# Altium PCB STM32L0_USB_TempSensor.PcbDoc
Units mm, origin at the board's own origin, x right, y up, seen from the top; angles counter-clockwise.
Board outline 71.5 x 35.5 mm, 2 copper layers (Top Layer, Bottom Layer); 42 components, 29 nets, 127 pads, 141 vias.
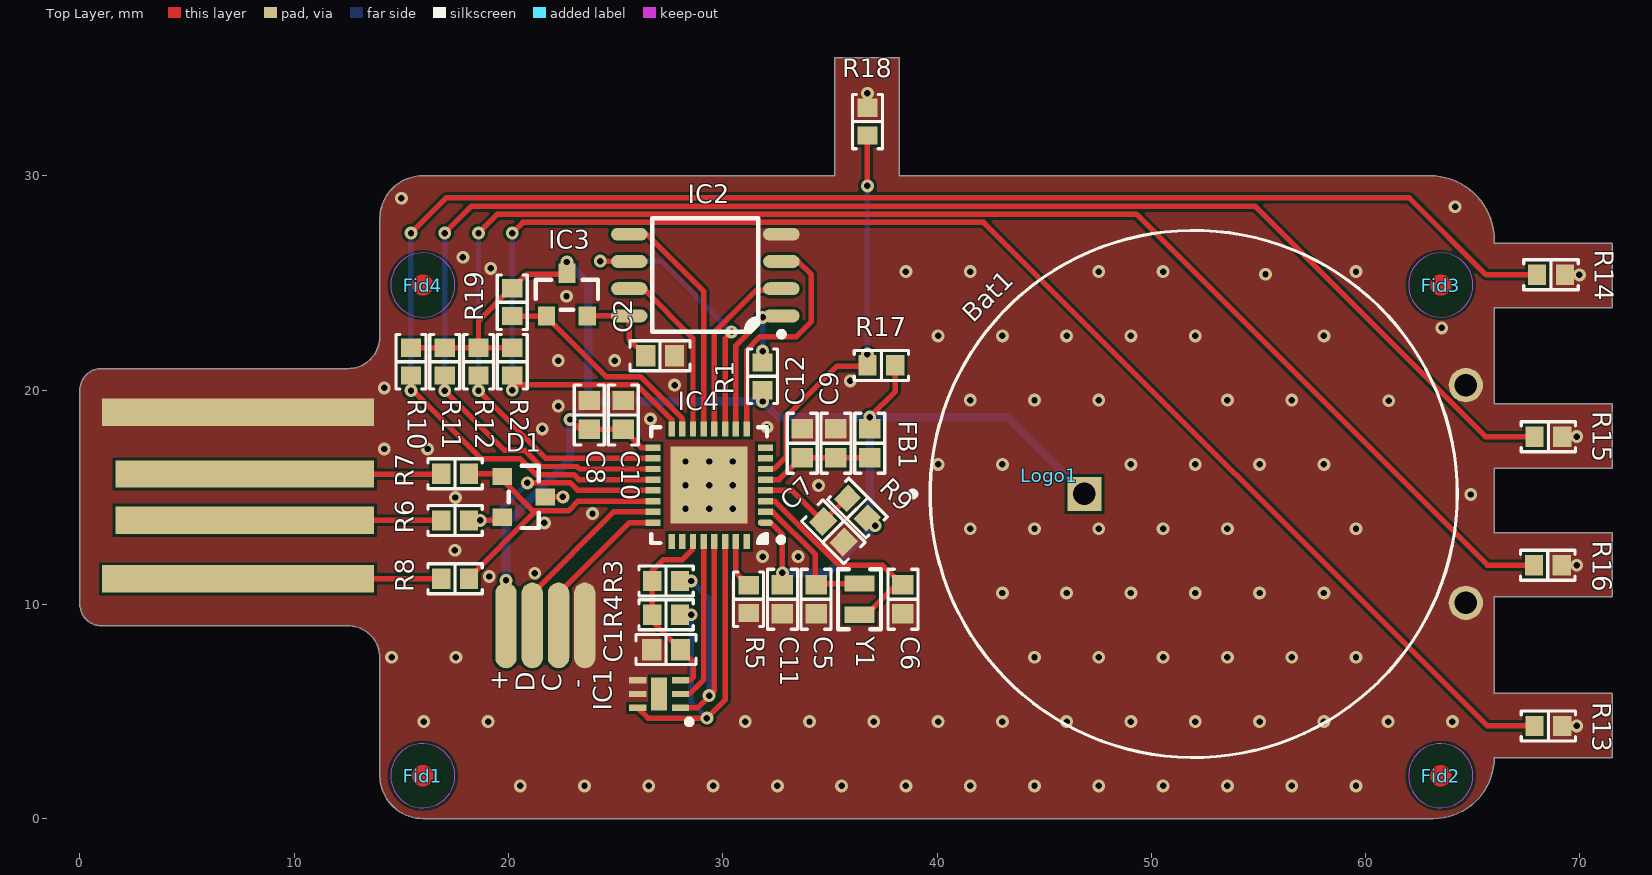
[diagram p0: Top Layer view]
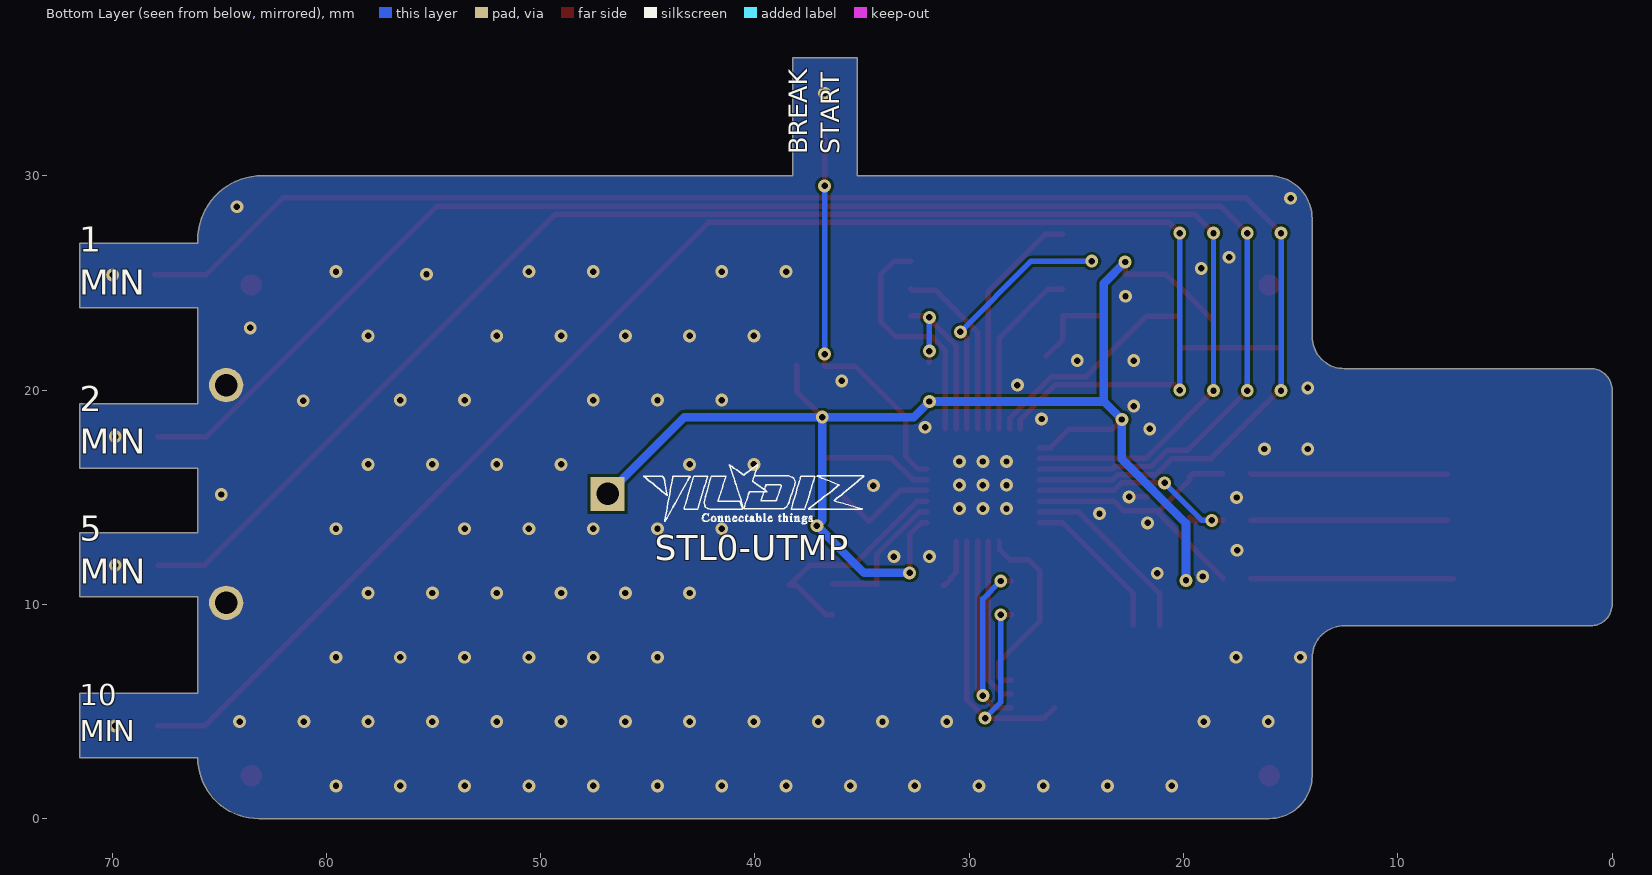
[diagram p1: Bottom Layer view, seen from below]
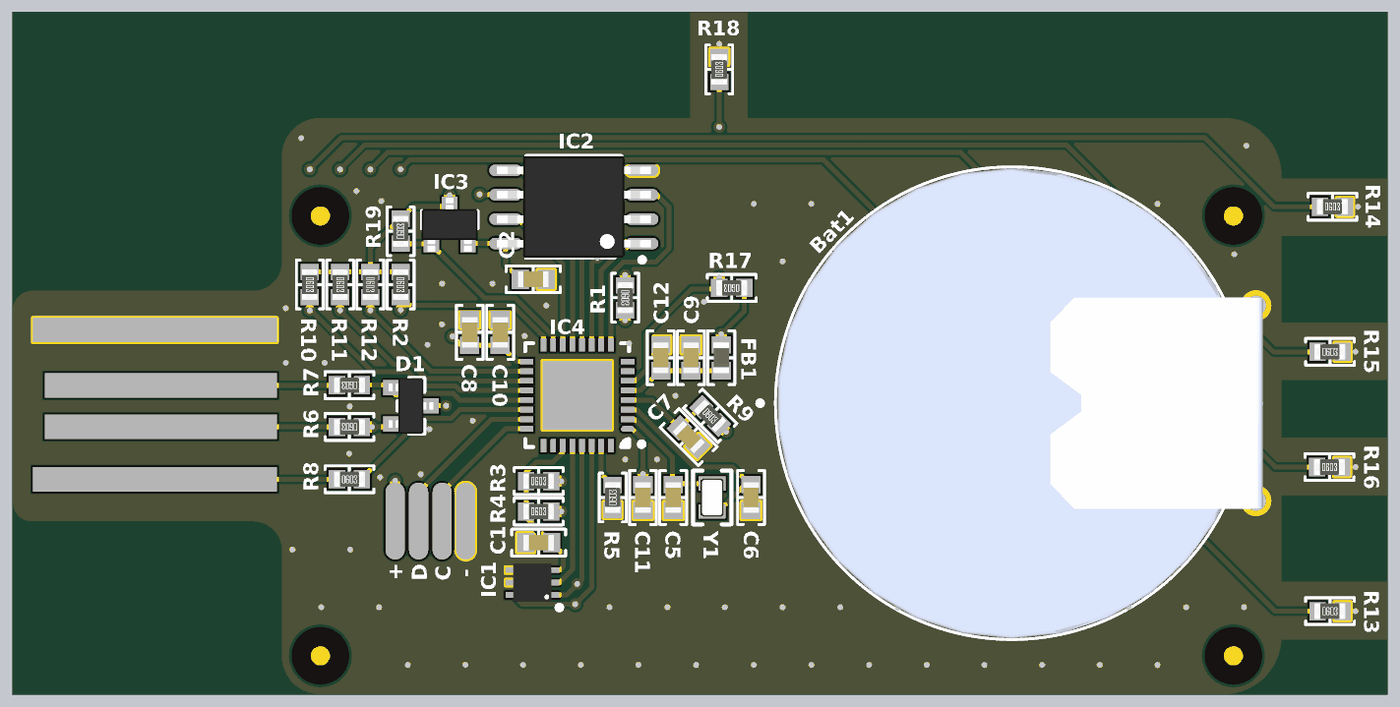
[diagram p2: 3D render of the assembled board from above, using the file's embedded part models]

## Layer stack, top to bottom
Top Solder: solder mask 0.0102, Solder Resist, Dk 3.5
Top Layer: signal copper 0.0356
Dielectric 1: dielectric 0.32, FR-4, Dk 4.8
Bottom Layer: signal copper 0.0356
Bottom Solder: solder mask 0.0102, Solder Resist, Dk 3.5

## Board outline
1,9 12.5,9 cw(c12.5,7.5) 14,7.5 14,2 ccw(c16,2) 16,0 63.15,0 ccw(c63.15,2.85) 66,2.85 71.5,2.85 71.5,5.85 66,5.85 66,10.35 71.5,10.35 71.5,13.35 66,13.35 66,16.35 71.5,16.35 71.5,19.35 66,19.35 66,23.85 71.5,23.85 71.5,26.85 66,26.85 66,27 ccw(c63,27) 63,30 38.225,30 38.225,35.5 35.225,35.5 35.225,30 16,30 ccw(c16,28) 14,28 14,22.5 cw(c12.5,22.5) 12.5,21 1,21 ccw(c1,20) 0,20 0,10 ccw(c1,10)

## Design rules (kind name [scope] priority, off if disabled: settings)
Clearance [All] p1: gap=0.127 ignorepadtopadclearanceinfootprint=FALSE
DiffPairsRouting "Schematic Differential Pairs Routing" [InNet('USB_HS_DM_N')] p1: maxlimit=0.254 minlimit=0.127 mostfreqgap=0.254 toplayer_minwidth=0.127 toplayer_maxwidth=0.381 toplayer_prefwidth=0.127 bottomlayer_minwidth=0.127 bottomlayer_maxwidth=0.381 bottomlayer_prefwidth=0.127 maxuncoupledlength=12.7
DiffPairsRouting USB_HS_DM_P [InNet('USB_HS_DM_P')] p2: maxlimit=0.254 minlimit=0.127 mostfreqgap=0.254 toplayer_minwidth=0.127 toplayer_maxwidth=0.381 toplayer_prefwidth=0.127 bottomlayer_minwidth=0.127 bottomlayer_maxwidth=0.381 bottomlayer_prefwidth=0.127 maxuncoupledlength=12.7
DiffPairsRouting [All] p3: maxlimit=0.3 minlimit=0.127 mostfreqgap=0.2 toplayer_minwidth=0.127 toplayer_maxwidth=0.3 toplayer_prefwidth=0.2 bottomlayer_minwidth=0.127 bottomlayer_maxwidth=0.3 bottomlayer_prefwidth=0.2 maxuncoupledlength=12.7
MatchedLengths "Schematic Matched Net Lengths_1" [InNet('USB_HS_DM_N')] p1: tolerance=2.54 checknetsindiffpair=TRUE checkdiffpairvsdiffpair=FALSE checkxsignals=FALSE checkothers=FALSE
MatchedLengths "Schematic Matched Net Lengths" [InNet('USB_HS_DM_P')] p2: tolerance=2.54 checknetsindiffpair=TRUE checkdiffpairvsdiffpair=FALSE checkxsignals=FALSE checkothers=FALSE
PlaneConnect [All] p1: planeconnectstyle=Direct reliefexpansion=0.508 reliefentries=4 reliefconductorwidth=0.254 reliefairgap=0.254
PolygonConnect [All] p1: connectstyle=Direct reliefconductorwidth=0.254 reliefentries=4 polygonreliefangle="90 Angle" airgapwidth=0.254
RoutingVias [All] p1: holewidth=0.3 width=0.6 viastyle="Through Hole" minholewidth=0.3 minwidth=0.6 maxholewidth=1 maxwidth=5
SolderMaskExpansion [All] p1: expansion=0.102 istentingtop=FALSE
Width [All] p1: maxlimit=3 minlimit=0.127 preferedwidth=0.2
28 further rules are at their usual default settings.

## Classes and differential pairs
component class STM32L0_USB_TempSensor: Fid1 Fid2 Fid3 Fid4 Logo1
differential pair class USB_FS: USB_HS_DM
component class U_STM32L0: Bat1 C5 C6 C7 C8 C9 C10 C11 C12 D1 FB1 IC4 R2 R3 R4 R5 R6 R7 R8 R9 R10 R11 R12 R13 R14 R15 R16 R17 R18 Y1
component class U_Sensor-Flash: C1 C2 IC1 IC2 IC3 R1 R19
differential pair USB_HS_DM: +USB_HS_DM_P -USB_HS_DM_N

## Components (designator, comment, footprint, x,y, rotation, side; value= is the part's Value field where it differs from the comment)
Bat1 "#NAME?" CR-2450/G1AN 51.975,15.15 r0 top locked
C1 "100nF" "CAP 0603/1608" 27.356,7.89 r0 top
C2 "100nF" "CAP 0603/1608" 27.075,21.6 r0 top
C5 "15pF" "CAP 0603/1608" 34.356,10.24 r90 top
C6 "15pF" "CAP 0603/1608" 38.406,10.24 r90 top
C7 "100nF" "CAP 0603/1608" 35.158,13.388 r135 top
C8 "10uF" "CAP 0603/1608" 23.771,18.84 r270 top
C9 "1uF" "CAP 0603/1608" 35.281,17.515 r270 top
C10 "100nF" "CAP 0603/1608" 25.356,18.84 r270 top
C11 "100nF" "CAP 0603/1608" 32.781,10.24 r90 top
C12 "100nF" "CAP 0603/1608" 33.706,17.515 r270 top
D1 "#NAME?" "ON SEMI SOT-23-3" 20.711,15.015 r0 top
FB1 "#NAME?" "FER 0603/1608" 36.856,17.515 r90 top
Fid1 "Fiducial mark" Fiducial 16,2 r0 top
Fid2 "Fiducial mark" Fiducial 63.5,2 r90 top
Fid3 "Fiducial mark" Fiducial 63.5,24.9 r90 top
Fid4 "Fiducial mark" Fiducial 16,24.9 r90 top
IC1 "STTS22HTR" "ST UDFN-6 2x2x0.5" 27.031,5.815 r180 top
IC2 "#NAME?" "WINBOND SOIC-8 208MIL WIDE" 29.186,25.365 r180 top
IC3 "#NAME?" "DIODES SOT-23-3" 22.725,24.45 r90 top
IC4 "ST STM32L052 32PIN" "ST VFQFN-33 5x5mm" 29.361,15.565 r180 top
Logo1 "Logo symbol" LOGO_YILDIZIOT 45.225,16 r180 top
R1 "10kR" "RES 0603/1608" 31.856,20.64 r270 top
R2 "10kR" "RES 0603/1608" 20.175,21.325 r270 top
R3 "10kR" "RES 0603/1608" 27.356,11.09 r0 top
R4 "10kR" "RES 0603/1608" 27.356,9.515 r0 top
R5 "10kR" "RES 0603/1608" 31.206,10.24 r90 top
R6 "20R" "RES 0603/1608" 17.511,13.915 r180 top
R7 "20R" "RES 0603/1608" 17.511,16.09 r180 top
R8 "10kR" "RES 0603/1608" 17.511,11.19 r0 top
R9 "10kR" "RES 0603/1608" 36.281,14.49 r315 top
R10 "10kR" "RES 0603/1608" 15.45,21.325 r270 top
R11 "10kR" "RES 0603/1608" 17.025,21.325 r270 top
R12 "10kR" "RES 0603/1608" 18.6,21.325 r270 top
R13 "10kR" "RES 0603/1608" 68.525,4.325 r0 top
R14 "10kR" "RES 0603/1608" 68.65,25.375 r0 top
R15 "10kR" "RES 0603/1608" 68.525,17.825 r0 top
R16 "10kR" "RES 0603/1608" 68.5,11.825 r0 top
R17 "10kR" "RES 0603/1608" 37.4,21.15 r180 top
R18 "10kR" "RES 0603/1608" 36.75,32.525 r90 top
R19 "10kR" "RES 0603/1608" 20.175,24.1 r90 top
Y1 "32.768kHz" "ABRACON ABS06" 36.381,10.24 r90 top

## Footprints (in the part's own frame and the unit in brackets; to place one, negate y for a bottom-side part, rotate by r counter-clockwise, add the part's x,y. Pads: shape width x height; smd on the part's side, far side on the other; paste and mask are expansions set on the pad)
"ABRACON ABS06" [mm] "Crystal, 2-Leads, Body 1.20x2.00mm, Pitch 1.50mm, IPC Medium Density"
  rect 0.75x1.4 smd: 1(-0.725,0) 2(0.725,0)
  silkscreen extent -1.4,-1 1.4,1, body extent -1.02,-0.62 1.03,0.63, height 0.6
"CAP 0603/1608" [mm] "Chip Capacitor, 2-Leads, Body 1.60x0.80mm, IPC Medium Density"
  rect 0.9x1 smd: 1(-0.675,0) 2(0.675,0)
  silkscreen extent -1.4,-0.7 1.4,0.7, body extent -0.8,-0.41 0.8,0.41, height 0.82
CR-2450/G1AN [mm]
  rect 1.6x1.6 hole 1.05 paste-2539.97 mask+0: 1(-5.1,0)
  round 1.6 hole 1.05 paste-2539.97 mask+0: 2(12.7,-5.08) 2(12.7,5.08)
  silkscreen extent -13.22,-12.3 12.3,12.3, body extent -12.25,-12.25 13.05,12.25, height 4.73
"DIODES SOT-23-3" [mm] "SOT23, 3-Leads, Body 2.90x2.40mm, Pitch 0.95mm, IPC Medium Density"
  rect 0.9x0.8 smd: 1(-1,0.95) 2(-1,-0.95) 3(1,0)
  silkscreen extent -0.7,-1.45 0.7,1.45, body extent -1.41,-1.45 1.41,1.45, height 1.5
"FER 0603/1608" [mm] "Chip Ferrite, 2-Leads, Body 1.60x0.80mm, IPC Medium Density"
  rect 0.9x1 smd: 1(-0.675,0) 2(0.675,0)
  silkscreen extent -1.4,-0.7 1.4,0.7, body extent -0.8,-0.41 0.8,0.41, height 0.82
Fiducial [mm] "Electrolitic Radial Capacitor, 5mm pin space, 0.8mm Hole, 10.1mm diametre, 15.2 height"
  Top Layer circle w1: c0,0 r0
  Top Layer keep-out circle w0.01: c0,0 r1.5
LOGO_YILDIZIOT [mm] "YýLDýZ IoT Logo"
"ON SEMI SOT-23-3" [mm] "SOT23, 3-Leads, Body 2.90x2.40mm, Pitch 0.95mm, IPC Medium Density"
  rect 0.9x0.8 smd: 1(-1,0.95) 2(-1,-0.95) 3(1,0)
  silkscreen extent -0.7,-1.45 0.7,1.45, body extent -1.16,-1.45 1.16,1.45, height 1
"RES 0603/1608" [mm] "Chip Resistor, 2-Leads, Body 1.60x0.80mm, IPC Medium Density"
  rect 0.85x0.95 smd: 1(-0.65,0) 2(0.65,0)
  silkscreen extent -1.27,-0.7 1.27,0.7, body extent -0.8,-0.4 0.8,0.4, height 0.45
"ST UDFN-6 2x2x0.5" [mm] "UDFN-6L (2.0 x 2.0 x 0.50 mm)"
  rect 0.8x0.3 smd: 1(-1,0.65) 2(-1,0) 3(-1,-0.65) 4(1,-0.65) 5(1,0) 6(1,0.65)
  rect 0.75x1.55 smd: 7(0,0)
  silkscreen extent -1.53,1.18 -1.28,1.42, body extent -1,-1 1,1, height 0.64
"ST VFQFN-33 5x5mm" [mm] "QFN, 32-Leads, Body 5.00x5.00mm, Pitch 0.50mm, Thermal Pad 3.6x3.6mm, IPC Medium Density"
  oval 0.7x0.3 smd: 1(-2.625,1.75)
  rect 0.7x0.3 smd: 2(-2.625,1.25) 3(-2.625,0.75) 4(-2.625,0.25) 5(-2.625,-0.25) 6(-2.625,-0.75) 7(-2.625,-1.25) 8(-2.625,-1.75) 17(2.625,-1.75) 18(2.625,-1.25) 19(2.625,-0.75) 20(2.625,-0.25) 21(2.625,0.25) 22(2.625,0.75) 23(2.625,1.25) 24(2.625,1.75)
  rect 0.3x0.7 smd: 9(-1.75,-2.625) 10(-1.25,-2.625) 11(-0.75,-2.625) 12(-0.25,-2.625) 13(0.25,-2.625) 14(0.75,-2.625) 15(1.25,-2.625) 16(1.75,-2.625) 25(1.75,2.625) 26(1.25,2.625) 27(0.75,2.625) 28(0.25,2.625) 29(-0.25,2.625) 30(-0.75,2.625) 31(-1.25,2.625) 32(-1.75,2.625)
  rect 3.6x3.6 smd: 33(0,0)
  silkscreen extent -3.48,-2.7 2.7,2.7, body extent -2.55,-2.55 2.55,2.55, height 0.85
"WINBOND SOIC-8 208MIL WIDE" [mm] "SOIC, 8-Leads, Body 5.28x5.28mm, Pitch 1.27mm, IPC Medium Density"
  oval 1.7x0.6 smd: 1(-3.55,1.905) 2(-3.55,0.635) 3(-3.55,-0.635) 4(-3.55,-1.905) 5(3.55,-1.905) 6(3.55,-0.635) 7(3.55,0.635) 8(3.55,1.905)
  silkscreen extent -3.68,-2.65 2.47,2.88, body extent -4.01,-2.64 4.01,2.64, height 1.5

## Part data
Bat1: "Bat Holder", Capacity=620mAh, Manufacturer="Panasonic BSG", Manufacturer Part Number=CR-2450/G1AN, Max Operating Temperature=60°C, Min Operating Temperature=-30°C, Output Voltage=3V, Package Quantity=200, Supplier Part Number 1=P661-ND, Chemistry/Technology=Lithium, ComponentLink1Description=https://datasheet.ciiva.com/2/aaa4000de105-2936.pdf?src-supplier=Digi-Key, ComponentLink1URL=https://datasheet.ciiva.com/2/aaa4000de105-2936.pdf?src-supplier=Digi-Key, ComponentLink2Description=https://datasheet.ciiva.com/24073/aaa4000de105-259051-24073605.pdf?src-supplier=Mouser, ComponentLink2URL=https://datasheet.ciiva.com/24073/aaa4000de105-259051-24073605.pdf?src-supplier=Mouser, Contact Plating=Tin, Depth=24.6mm, Diameter=24.5mm, Height=5mm, Lead Free="Lead Free", Length=24.6mm, Mount="Through Hole", Number of Cells=1, Orientation=Horizontal, Packaging=Bulk, Pricing 1="1 = 1,76000, 20 = 1,46300, 40 = 1,35975, 100 = 1,21560, 300 = 1,13323, 500 = 1,07140, 1000 = 1,00960, 2500 = 0,94092 (USD)", RoHS=Yes, Stock 1=10737, Supplier 1=Digi-Key, Termination="PC Pin", Voltage Rating=3V, Weight=6.3g
C1 C2 C7 C10 C11 C12: library part "Capacitor - Ceramic", "Ceramic, SMT Capacitor", Case/Package=0603, Case Code (Metric)=1608, Dielectric=X7R, Manufacturer=Samsung, Manufacturer Part Number=CL10B104JB8NNNC, Max Operating Temperature=125°C, Min Operating Temperature=-55°C, Package Quantity=1, Supplier Part Number 1=1276-1033-1-ND, Tolerance=5%, Voltage=50V, Capacitance=100nF, Case Code (Imperial)=0603, Contact Plating=Tin, Depth=0.8mm, Height=0.8mm, Length=1.6mm, Material=Ceramic, Mount="Surface Mount", Packaging="Tape and Reel", Radiation Hardening=No, RoHS=Yes, Supplier 1=Digi-Key, Thickness=0.035inch, Voltage Rating=50V, Width=0.031inch
  C1 C7 C10 C11 C12: ComponentLink1Description=https://media.digikey.com/pdf/Data%20Sheets/Samsung%20PDFs/CL_Series_MLCC_ds.pdf?src-supplier=Digi-Key, ComponentLink1URL=https://media.digikey.com/pdf/Data%20Sheets/Samsung%20PDFs/CL_Series_MLCC_ds.pdf?src-supplier=Digi-Key, ComponentLink2Description=https://www.verical.com/server-webapp/html/getDatasheet?partID=359321&src-supplier=Verical, ComponentLink2URL=https://www.verical.com/server-webapp/html/getDatasheet?partID=359321&src-supplier=Verical, ComponentLink3Description=http://www1.futureelectronics.com/doc/SAMSUNG/CL10B104JB8NNNC.pdf?src-supplier=Future+Electronics, ComponentLink3URL=http://www1.futureelectronics.com/doc/SAMSUNG/CL10B104JB8NNNC.pdf?src-supplier=Future+Electronics, ComponentLink4Description=https://produktinfo.conrad.com/datenblaetter/450000-474999/456613-da-01-en-VS_KONDENSATOR_0603.pdf?src-supplier=Conrad, ComponentLink4URL=https://produktinfo.conrad.com/datenblaetter/450000-474999/456613-da-01-en-VS_KONDENSATOR_0603.pdf?src-supplier=Conrad, Pricing 1="1 = 0,10000, 10 = 0,05300, 100 = 0,02350, 500 = 0,01680, 1000 = 0,01320 (USD)", Stock 1=223594
  C2: ComponentLink1Description=https://datasheet.ciiva.com/25793/cl10b104jb8nnnc-25793394.pdf?src-supplier=Digi-Key, ComponentLink1URL=https://datasheet.ciiva.com/25793/cl10b104jb8nnnc-25793394.pdf?src-supplier=Digi-Key, ComponentLink2Description=https://datasheet.ciiva.com/26838/getdatasheetpartid-359321-26838402.pdf?src-supplier=Verical, ComponentLink2URL=https://datasheet.ciiva.com/26838/getdatasheetpartid-359321-26838402.pdf?src-supplier=Verical, ComponentLink3Description=https://datasheet.ciiva.com/16498/cl10b104jb8nnnc-16498485.pdf?src-supplier=Future+Electronics, ComponentLink3URL=https://datasheet.ciiva.com/16498/cl10b104jb8nnnc-16498485.pdf?src-supplier=Future+Electronics, ComponentLink4Description=https://datasheet.ciiva.com/29199/456613-da-01-en-vs-kondensator-0603-29199008.pdf?src-supplier=Conrad, ComponentLink4URL=https://datasheet.ciiva.com/29199/456613-da-01-en-vs-kondensator-0603-29199008.pdf?src-supplier=Conrad, Pricing 1="1 = 0,10000, 10 = 0,04800, 100 = 0,02160, 500 = 0,01540, 1000 = 0,01210 (USD)", Stock 1=305374
C5 C6: library part "Capacitor - Ceramic", "Ceramic, SMT Capacitor", Case/Package=0603, Case Code (Metric)=1608, Dielectric=C0G, Manufacturer="Walsin Technologies", Manufacturer Part Number=0603N150J500CT, Max Operating Temperature=125°C, Min Operating Temperature=-55°C, Supplier Part Number 1=1292-1487-1-ND, Tolerance=5%, Voltage Rating=50V, Capacitance=15pF, Case Code (Imperial)=0603, ComponentLink1Description=http://www.farnell.com/datasheets/1958513.pdf?src-supplier=Farnell, ComponentLink1URL=http://www.farnell.com/datasheets/1958513.pdf?src-supplier=Farnell, ComponentLink2Description=http://www.farnell.com/datasheets/2340522.pdf?src-supplier=Farnell, ComponentLink2URL=http://www.farnell.com/datasheets/2340522.pdf?src-supplier=Farnell, ComponentLink3Description=http://components.arrow.com/part/dataview/0323_03468609?src-supplier=Arrow+Europe, ComponentLink3URL=http://components.arrow.com/part/dataview/0323_03468609?src-supplier=Arrow+Europe, ComponentLink4Description=http://www.farnell.com/datasheets/1958513.pdf?src-supplier=Element14, ComponentLink4URL=http://www.farnell.com/datasheets/1958513.pdf?src-supplier=Element14, Depth=0.8mm, Length=1.6mm, Packaging="Tape and Reel", Pricing 1="1 = 0,10000, 10 = 0,03300, 100 = 0,01490, 500 = 0,01062, 1000 = 0,00835 (USD)", REACH SVHC=Unknown, RoHS=Yes, Stock 1=219118, Supplier 1=Digi-Key, Voltage Rating (DC)=50V
C8: library part "Capacitor - Ceramic", "Ceramic, SMT Capacitor", Case/Package=0603, Dielectric=X5R, Manufacturer="Kyocera AVX", Manufacturer Part Number=0603ZD106KAT2A, Supplier Part Number 1=478-10766-1-ND, Tolerance=10%, Voltage Rating (DC)=10V, Capacitance=10uF, ComponentLink1Description=https://datasheet.ciiva.com/25713/cl10a475mq8nnnc-25713301.pdf?src-supplier=Digi-Key, ComponentLink1URL=https://datasheet.ciiva.com/25713/cl10a475mq8nnnc-25713301.pdf?src-supplier=Digi-Key, ComponentLink2Description=https://datasheet.ciiva.com/26838/getdatasheetpartid-358407-26838391.pdf?src-supplier=Verical, ComponentLink2URL=https://datasheet.ciiva.com/26838/getdatasheetpartid-358407-26838391.pdf?src-supplier=Verical, ComponentLink3Description=https://datasheet.ciiva.com/16437/cl05b104kq5nnnc-16437323.pdf?src-supplier=Future+Electronics, ComponentLink3URL=https://datasheet.ciiva.com/16437/cl05b104kq5nnnc-16437323.pdf?src-supplier=Future+Electronics, ComponentLink4Description=http://datasheets.avx.com/cx5r.pdf?src-supplier=Digi-Key, ComponentLink4URL=http://datasheets.avx.com/cx5r.pdf?src-supplier=Digi-Key, Pricing 1="1 = 0,13000, 10 = 0,09200 (USD)", RoHS=No, Stock 1=32713, Supplier 1=Digi-Key
C9: library part "Capacitor - Ceramic", "Ceramic, SMT Capacitor", Case/Package=0603, Case Code (Metric)=1608, Dielectric=X5R, Manufacturer=Samsung, Manufacturer Part Number=CL10A105KP8NNNC, Max Operating Temperature=85°C, Min Operating Temperature=-55°C, Package Quantity=1, Supplier Part Number 1=1276-1182-1-ND, Tolerance=10%, Voltage=10V, Capacitance=1uF, Case Code (Imperial)=0603, ComponentLink1Description=https://datasheet.ciiva.com/15195/getdatasheetpartid-358616-15195708.pdf?src-supplier=Verical, ComponentLink1URL=https://datasheet.ciiva.com/15195/getdatasheetpartid-358616-15195708.pdf?src-supplier=Verical, ComponentLink2Description=https://datasheet.ciiva.com/16358/cl05b104kq5nnnc-16358431.pdf?src-supplier=Future+Electronics, ComponentLink2URL=https://datasheet.ciiva.com/16358/cl05b104kq5nnnc-16358431.pdf?src-supplier=Future+Electronics, Contact Plating=Tin, Depth=0.8mm, Height=0.8mm, Length=1.6mm, Mount="Surface Mount", Packaging="Tape and Reel", Pricing 1="1 = 0,10000, 10 = 0,03800, 100 = 0,01680, 500 = 0,01200, 1000 = 0,00943 (USD)", Radiation Hardening=No, RoHS=Yes, Stock 1=4590831, Supplier 1=Digi-Key, Thickness=0.035inch, Voltage Rating=10V, Width=0.031inch
D1: library part NUP2105LT1G, "TVS DIODE 24V 44V SOT23-3", Capacitance @ Frequency="30pF @ 1MHz", Current - Peak Pulse (10/1000µs)="8A (8/20µs)", Device Package="TO-236-3, SC-59, SOT-23-3", Manufacturer="ON Semiconductor", Operating Temperature="-55°C ~ 150°C (TJ)", Power - Peak Pulse=350W, Power Line Protection=No, Supplier Device Package="SOT-23-3 (TO-236)", Supplier Part Number 1=NUP2105LT1GOSCT-ND, Voltage - Breakdown (Min)=26.2V, Voltage - Clamping (Max) @ Ipp=44V, Voltage - Reverse Standoff (Typ)="24V (Min)", Applications="General Purpose", Bidirectional Channels=2, ComponentLink1Description=Datasheet, ComponentLink1URL=http://www.onsemi.com/pub/Collateral/NUP2105L-D.PDF, ComponentLink2Description="DigiKey Link", ComponentLink2URL=http://digikey.com/product-detail/en/on-semiconductor/NUP2105LT1G/NUP2105LT1GOSCT-ND/1485001, LastUpdated="30.03.2020 16:33:57", Lifecycle Status=Active, Manufacturer Part Number=NUP2105LT1G, Minimum Order=1, Mounting Type="Surface Mount", Package / Case="TO-236-3, SC-59, SOT-23-3", Packaging=TapeAndReel, PartId=10506, Part Status=Active, Price=0.09, Series=-, Supplier 1=DigiKey, Type=Zener
FB1: library part "Ferrite Chip", "SMT Ferrite Chip", Case/Package=0603, Case Code (Metric)=1608, Current Rating=500mA, DC Resistance (DCR)=380mR, Frequency=100MHz, Manufacturer=Murata, Manufacturer Part Number=BLM18AG601SN1D, Max Operating Temperature=125°C, Min Operating Temperature=-55°C, Package Quantity=1, Supplier Part Number 1=490-1014-1-ND, Tolerance=25%, Case Code (Imperial)=0603, ComponentLink1Description=https://datasheet.ciiva.com/19460/1844766-19460213.pdf?src-supplier=Jameco, ComponentLink1URL=https://datasheet.ciiva.com/19460/1844766-19460213.pdf?src-supplier=Jameco, ComponentLink2Description=https://datasheet.ciiva.com/29347/442309-da-01-en-chip-drossel-0603-600r-500ma-1-6x0-8mm-29347900.pdf?src-supplier=Conrad, ComponentLink2URL=https://datasheet.ciiva.com/29347/442309-da-01-en-chip-drossel-0603-600r-500ma-1-6x0-8mm-29347900.pdf?src-supplier=Conrad, ComponentLink3Description=https://datasheet.ciiva.com/41449/001172228-da-01-en-drossel-0603-600r-1-6x0-8mm-4000st-41449517.pdf?src-supplier=Conrad, ComponentLink3URL=https://datasheet.ciiva.com/41449/001172228-da-01-en-drossel-0603-600r-1-6x0-8mm-4000st-41449517.pdf?src-supplier=Conrad, ComponentLink4Description=https://datasheet.ciiva.com/1012/l0110s0100blm18a-1012018.pdf?src-supplier=Digi-Key, ComponentLink4URL=https://datasheet.ciiva.com/1012/l0110s0100blm18a-1012018.pdf?src-supplier=Digi-Key, ComponentLink5Description=https://datasheet.ciiva.com/1012/l0110s0100blm18a-1012019.pdf?src-supplier=Digi-Key, ComponentLink5URL=https://datasheet.ciiva.com/1012/l0110s0100blm18a-1012019.pdf?src-supplier=Digi-Key, ComponentLink6Description=https://datasheet.ciiva.com/1466/1756147-1466934.pdf?src-supplier=Element14, ComponentLink6URL=https://datasheet.ciiva.com/1466/1756147-1466934.pdf?src-supplier=Element14, ComponentLink7Description=https://datasheet.ciiva.com/3081/l0110s0100blm18a-3081613.pdf?src-supplier=Avnet, ComponentLink7URL=https://datasheet.ciiva.com/3081/l0110s0100blm18a-3081613.pdf?src-supplier=Avnet, ComponentLink8Description=https://datasheet.ciiva.com/1012/l0110s0100blm18a-1012017.pdf?src-supplier=Digi-Key, ComponentLink8URL=https://datasheet.ciiva.com/1012/l0110s0100blm18a-1012017.pdf?src-supplier=Digi-Key, ComponentLink9Description=https://datasheet.ciiva.com/1466/1756147-1466933.pdf?src-supplier=Element14, ComponentLink9URL=https://datasheet.ciiva.com/1466/1756147-1466933.pdf?src-supplier=Element14, ComponentLink10Description=https://datasheet.ciiva.com/16210/l0110s0100blm18a-16210006.pdf?src-supplier=Future+Electronics, ComponentLink10URL=https://datasheet.ciiva.com/16210/l0110s0100blm18a-16210006.pdf?src-supplier=Future+Electronics, Core Material=Ferrite, DC Current=500mA, Depth=0.8mm, Height=0.8mm, Impedance=600R, Lead Free="Lead Free", Length=1.6mm, Material=Steel, Max Current Rating=500mA, Max DC Current=500mA, Military Standard=Not, Number of Circuits=1, Number of Lines=1, Number of Pins=2, Packaging="Tape and Reel", Pricing 1="1 = 0,10000, 10 = 0,07900, 25 = 0,07200, 50 = 0,06480, 100 = 0,04760, 250 = 0,03460, 500 = 0,03170, 1000 = 0,02738 (USD)", Radiation Hardening=No, REACH SVHC="No SVHC", RoHS=Yes, Shielding=Unshielded, Stock 1=1151376, Supplier 1=Digi-Key, Termination=SMD/SMT, Test Frequency=100MHz, Weight=7.1E-05oz, Width=0.8mm
Fid1 Fid2 Fid3 Fid4: "Fiducial Mark", Part Number=Fid-Mark, Artikkelnr Noca=N.A., Artikkelnr Simpro=N.A., Footprint Doc=Fiducial, LatestRevisionDate=2009-12-12, Pin Count=1, Published=2009-12-12, Publisher="Nordic Semiconductor"
IC1: library part "ST STTS22HTR", "Low-voltage, ultra-low-power, 0.5 °C accuracy I²C/SMBus 3.0 temperature sensor", Manufacturer=STMicroelectronics, Mouser Part Number=511-STTS22HTR, RS Part Number=1947647P, Supplier Part Number 1=497-STTS22HCT-ND, Datasheet Link=https://www.mouser.com/datasheet/2/389/stts22h-1663205.pdf, Height=0.55mm, Manufacturer_Name=STMicroelectronics, Manufacturer_Part_Number=STTS22HTR, Manufacturer Part Number=STTS22HTR, Mouser Price/Stock=https://www.mouser.co.uk/ProductDetail/STMicroelectronics/STTS22HTR?qs=%252B6g0mu59x7LCfjXXPvLkpg%3D%3D, Pricing 1="1 = 1,53000, 10 = 1,37200, 25 = 1,30200, 100 = 1,06950, 250 = 0,99976, 500 = 0,88350, 1000 = 0,69750 (USD)", RoHS=No, RS Price/Stock=http://uk.rs-online.com/web/p/products/1947647P, Stock 1=5772, Supplier 1=Digi-Key
IC2: library part "WINBOND FLASH SPI 8PIN", Case/Package=SOIC, Frequency=50MHz, Manufacturer=Winbond, Manufacturer Part Number=W25X20CLSNIG, Max Operating Temperature=85°C, Max Supply Voltage=3.6V, Min Operating Temperature=-40°C, Min Supply Voltage=2.3V, Nominal Supply Current=14mA, Package Quantity=100, Supplier Part Number 1=W25X20CLSNIG-ND, Access Time=8ns, Address Bus Width=24b, ComponentLink1Description=http://www.winbond.com/resource-files/w25q128jv_dtr%20revc%2003272018%20plus.pdf?src-supplier=Digi-Key, ComponentLink1URL=http://www.winbond.com/resource-files/w25q128jv_dtr%20revc%2003272018%20plus.pdf?src-supplier=Digi-Key, ComponentLink2Description=https://datasheet.ciiva.com/1907/serialflashselectionguide1112911-1907412.pdf?src-supplier=Digi-Key, ComponentLink2URL=https://datasheet.ciiva.com/1907/serialflashselectionguide1112911-1907412.pdf?src-supplier=Digi-Key, Density=2Mb, Interface=SPI,Serial, Memory Type=FLASH, Mount="Surface Mount", Number of Pins=8, Number of Words=256000, Packaging=Rail/Tube, Pricing 1="1 = 0,35000, 10 = 0,34200, 25 = 0,31800, 50 = 0,31600, 100 = 0,28080, 250 = 0,27712, 500 = 0,27298, 1000 = 0,26566, 5000 = 0,23877 (USD)", Radiation Hardening=No, RoHS=Yes, Stock 1=12189, Supplier 1=Digi-Key, Sync/Async=Synchronous
IC3: library part BSS84-7-F, "MOSFET P-CH 50V 130MA SOT23-3", Current - Continuous Drain (Id) @ 25°C="130mA (Ta)", Device Package="TO-236-3, SC-59, SOT-23-3", Drain to Source Voltage (Vdss)=50V, Drive Voltage (Max Rds On,  Min Rds On)=5V, Input Capacitance (Ciss) (Max) @ Vds="45pF @ 25V", Manufacturer="Diodes Incorporated", Operating Temperature="-55°C ~ 150°C (TJ)", Power Dissipation (Max)="300mW (Ta)", Supplier Device Package=SOT-23-3, Supplier Part Number 1=BSS84-FDICT-ND, ComponentLink1Description=Datasheet, ComponentLink1URL=https://www.diodes.com/assets/Datasheets/ds30149.pdf, ComponentLink2Description="DigiKey Link", ComponentLink2URL=http://digikey.com/product-detail/en/diodes-incorporated/BSS84-7-F/BSS84-FDICT-ND/717844, FET Type=P-Channel, LastUpdated="21.01.2020 04:00:37", Lifecycle Status=Active, Minimum Order=1, Mounting Type="Surface Mount", Package / Case="TO-236-3, SC-59, SOT-23-3", Packaging=TapeAndReel, Part Number=BSS84-7-F, Part Status=Active, Price=0.03, Rds On (Max) @ Id, Vgs="10Ohm @ 100mA, 5V", Series=-, Supplier 1=DigiKey, Technology="MOSFET (Metal Oxide)", Vgs (Max)=±20V, Vgs(th) (Max) @ Id="2V @ 1mA"
IC4: Case/Package=UFQFPN, Frequency=32MHz, Manufacturer=STMicroelectronics, Manufacturer Part Number=STM32L052K6U6, Max Operating Temperature=85°C, Max Power Dissipation=351mW, Min Operating Temperature=-40°C, Package Quantity=2940, Supplier Part Number 1=497-17492-ND, ComponentLink1Description=https://datasheet.ciiva.com/48492/dm00108217-48492190.pdf?src-supplier=Avnet, ComponentLink1URL=https://datasheet.ciiva.com/48492/dm00108217-48492190.pdf?src-supplier=Avnet, Core Architecture=ARM, Data Bus Width=32b, Interface=I2C,SPI,USB,IrDA,UART,USART,I2S, Max Frequency=32MHz, Memory Size=32KB, Memory Type=FLASH, Number of I/Os=27, Number of Programmable I/O=27, Number of Timers/Counters=5, Oscillator Type=Internal, Packaging=Tray, Peripherals="Brown-out Detect/Reset,POR,PWM,WDT,DMA", Pricing 1="1 = 3,25000, 10 = 2,91800, 25 = 2,75840, 100 = 2,39070, 250 = 2,26812, 500 = 2,03516, 1000 = 1,71640, 2500 = 1,63058, 5000 = 1,56928 (USD)", RAM Size=8KB, RoHS=Yes, Stock 1=1850, Supplier 1=Digi-Key, Watchdog Timer=Yes
Logo1: library part Logo, "Schematic symbol for Logo"
R1 R2 R3 R4 R5 R8 R9 R10 R11 R12 R13 R14 R15 R16 R17 R18 R19: library part Resistor_Chip, "Ceramic, SMT Capacitor", Case/Package=0603, Case Code (Metric)=1608, Manufacturer="Stackpole Electronics", Manufacturer Part Number=RNCP0603FTD10K0, Max Operating Temperature=155°C, Max Power Dissipation=125mW, Min Operating Temperature=-55°C, Supplier Part Number 1=RNCP0603FTD10K0CT-ND, Temperature Coefficient=100ppm/°C, Tolerance=1%, Case Code (Imperial)=0603, Composition="Thin Film", Height=0.02inch, Lead Free="Lead Free", Length=0.059inch, Mount="Surface Mount", Number of Terminations=2, Packaging="Tape and Reel", Pricing 1="1 = 0,10000, 10 = 0,06700, 100 = 0,02730, 1000 = 0,01224, 2500 = 0,01063 (USD)", Radiation Hardening=No, Resistance=10kR, RoHS=Yes, Supplier 1=Digi-Key, Width=0.031inch
  R1 R19: ComponentLink1Description=https://www.seielect.com/Catalog/SEI-rncp.pdf?src-supplier=Avnet, ComponentLink1URL=https://www.seielect.com/Catalog/SEI-rncp.pdf?src-supplier=Avnet, ComponentLink2Description=https://www.seielect.com/catalog/SEI-Packaging.pdf?src-supplier=Digi-Key, ComponentLink2URL=https://www.seielect.com/catalog/SEI-Packaging.pdf?src-supplier=Digi-Key, ComponentLink3Description=https://www.seielect.com/Catalog/SEI-rncp.pdf?src-supplier=Digi-Key, ComponentLink3URL=https://www.seielect.com/Catalog/SEI-rncp.pdf?src-supplier=Digi-Key, Contact Plating=Tin,Matte, Features="Moisture Resistant,Anti-Sulfur", Stock 1=619664
  R2 R3 R4 R5 R8 R9 R10 R11 R12 R13 R14 R15 R16 R17 R18: Contact Plating=Matte,Tin, Features="Anti-Sulfur,Moisture Resistant", Stock 1=183083
R6 R7: library part Resistor_Chip, "Ceramic, SMT Capacitor", Case/Package=0603, Case Code (Metric)=1608, Manufacturer=Panasonic, Manufacturer Part Number=ERJ3EKF20R0V, Max Operating Temperature=155°C, Max Power Dissipation=100mW, Min Operating Temperature=-55°C, Package Quantity=1, Supplier Part Number 1=P20.0HCT-ND, Temperature Coefficient=100ppm/°C, Tolerance=1%, Voltage Rating=75V, Voltage Rating (DC)=50V, Case Code (Imperial)=0603, ComponentLink1Description=http://industrial.panasonic.com/www-data/pdf/AOA0000/AOA0000CE2.pdf, ComponentLink1URL=http://industrial.panasonic.com/www-data/pdf/AOA0000/AOA0000CE2.pdf, ComponentLink2Description=https://www.alliedelec.com/m/d/623f45ff1957d936ff56d46fd1c28cac.pdf, ComponentLink2URL=https://www.alliedelec.com/m/d/623f45ff1957d936ff56d46fd1c28cac.pdf, ComponentLink3Description=http://www.jameco.com/Jameco/Products/ProdDS/1987732.pdf, ComponentLink3URL=http://www.jameco.com/Jameco/Products/ProdDS/1987732.pdf, ComponentLink4Description=http://www.farnell.com/datasheets/1678782.pdf, ComponentLink4URL=http://www.farnell.com/datasheets/1678782.pdf, ComponentLink5Description=http://www.farnell.com/datasheets/1911175.pdf, ComponentLink5URL=http://www.farnell.com/datasheets/1911175.pdf, ComponentLink6Description=http://www.mouser.com/ds/2/315/AOA0000CE2-37512.pdf, ComponentLink6URL=http://www.mouser.com/ds/2/315/AOA0000CE2-37512.pdf, Composition="Thick Film", Contact Plating=Tin, Depth=0.8mm, Features="Automotive AEC-Q200", Height=0.45mm, Lead Free="Lead Free", Length=1.6mm, Military Standard=Not, Mount="Surface Mount", Number of Terminations=2, Packaging="Tape and Reel", Power Rating=100mW, Pricing 1="1 = 0,10000, 10 = 0,06500, 100 = 0,02640, 1000 = 0,01186, 2500 = 0,01029 (USD)", Radiation Hardening=No, REACH SVHC="No SVHC", Resistance=20R, RoHS=Yes, Stock 1=1013618, Supplier 1=Digi-Key, Termination=SMD/SMT, Width=0.031inch
Y1: library part ABS06-32.768KHZ-1-T, "CRYSTAL 32.7680KHZ 12.5PF SMD", Case/Package=CSMD, Device Package=2-SMD, ESR (Equivalent Series Resistance)=90kR, Frequency Stability=-, Frequency Tolerance=10ppm, Load Capacitance=12.5pF, Manufacturer="Abracon LLC", Max Operating Temperature=85°C, Min Operating Temperature=-40°C, Operating Mode=Fundamental, Package Quantity=3000, Supplier Part Number 1=535-10248-1-ND, ComponentLink1Description=Datasheet, ComponentLink1URL=http://www.abracon.com/Resonators/ABS06.pdf, ComponentLink2Description="Digi-Key Listing", ComponentLink2URL=http://www.digikey.com/product-detail/en/ABS06-32.768KHZ-1-T/535-10248-2-ND/2217994, ComponentLink3Description=https://datasheet.ciiva.com/15116/getdatasheetpartid-721079-15116832.pdf?src-supplier=Verical, ComponentLink3URL=https://datasheet.ciiva.com/15116/getdatasheetpartid-721079-15116832.pdf?src-supplier=Verical, ComponentLink4Description=https://datasheet.ciiva.com/7998/abs06-7998658.pdf?src-supplier=Element14, ComponentLink4URL=https://datasheet.ciiva.com/7998/abs06-7998658.pdf?src-supplier=Element14, ComponentLink5Description=https://datasheet.ciiva.com/1357/1796520-1357315.pdf?src-supplier=Element14, ComponentLink5URL=https://datasheet.ciiva.com/1357/1796520-1357315.pdf?src-supplier=Element14, ComponentLink6Description=https://datasheet.ciiva.com/28508/1912788-28508597.pdf?src-supplier=Element14, ComponentLink6URL=https://datasheet.ciiva.com/28508/1912788-28508597.pdf?src-supplier=Element14, ComponentLink7Description=https://datasheet.ciiva.com/856/abs06-856604.pdf?src-supplier=Digi-Key, ComponentLink7URL=https://datasheet.ciiva.com/856/abs06-856604.pdf?src-supplier=Digi-Key, ComponentLink8Description=https://datasheet.ciiva.com/3176/abs06-3176156.pdf?src-supplier=Avnet, ComponentLink8URL=https://datasheet.ciiva.com/3176/abs06-3176156.pdf?src-supplier=Avnet, ComponentLink9Description=https://datasheet.ciiva.com/856/abs06-856605.pdf?src-supplier=Digi-Key, ComponentLink9URL=https://datasheet.ciiva.com/856/abs06-856605.pdf?src-supplier=Digi-Key, ComponentLink10Description=https://datasheet.ciiva.com/856/abs06-856606.pdf?src-supplier=Digi-Key, ComponentLink10URL=https://datasheet.ciiva.com/856/abs06-856606.pdf?src-supplier=Digi-Key, Depth=1.2mm, ESR="90 kOhm", Frequency=32.768kHz, Height=0.024inch, Lead Free="Lead Free", Length=2mm, Manufacturer Part Number=ABS06-32.768KHZ-1-T, Mount="Surface Mount", Number of Pins=2, Packaging="Tape and Reel", PartId=8532, Pricing 1="1 = 0,80000, 10 = 0,70800, 50 = 0,66220, 100 = 0,58520, 500 = 0,55440, 1000 = 0,46200 (USD)", Radiation Hardening=No, REACH SVHC="No SVHC", RoHS=Yes, Series Resistance=90kR, Stock 2=63513, Supplier 1=Digi-Key, Termination=SMD/SMT, Tolerance=10ppm, Type="kHz Crystal (Tuning Fork)", Width=1.2mm

## Free pads (board coordinates)
  rect 12.7x1.27 smd: 1(7.385,11.19) 4(7.385,18.96)
  oval 1x4 smd: 1(19.886,9.015) 2(21.111,9.015) 3(22.336,9.015) 4(23.561,9.015)
  rect 12.065x1.27 smd: 2(7.703,13.92) 3(7.703,16.079)

## Via types
v1: diameter 0.6, hole 0.3, Top Layer to Bottom Layer, tented both sides, 132 vias
v2: diameter 0.6, hole 0.3, Top Layer to Bottom Layer, 9 vias

## Nets (pads, with @x,y where several pads share a name; then routed paths per layer and width w, separated by ;. In a path a pad name is that pad's centre, name@x,y a point inside that pad or via, vN(x,y) a via of type N, cw(c..) or ccw(c..) an arc to the next point about the centre after c; other vN are vias at no path point)
3v3: Bat1.1 C8.2 C10.2 C11.2 FB1.2 IC3.3 IC4.1 IC4.17 pad.1@19.886,9.015 R1.2 R2.1 R9.2 R10.1 R11.1 R12.1 R17.1 R19.2 | length 73.9
  Top Layer w0.254: R10.1 R11.1 R12.1 ; R2.1 R12.1 ; v1(22.725,25.975) IC3.3 22.725,25.4 20.825,25.4 R19.2 20.125,24.75 18.6,23.225 R12.1 ; v1(22.875,18.625) 23.335,18.165 C8.2 C10.2 26.204,17.317 26.734,17.317 IC4.17 ; IC4.1 32.231,13.815 32.781,13.265 v1(32.781,11.465) ; v1(36.856,18.74) 38.05,19.934 R17.1
  Bottom Layer w0.4: v1(19.886,11.115) 19.886,13.778 22.875,16.767 v1(22.875,18.625) 23.715,19.465 ; v1(22.725,25.975) 23.715,24.985 23.715,19.465 ; v1(32.781,11.465) 34.906,11.465 v1(37.106,13.665) 36.856,13.915 v1(36.856,18.74) ; Bat1.1 43.285,18.74 v1(36.856,18.74) ; 23.715,19.465 v1(31.856,19.465) 32.581,18.74 v1(36.856,18.74)
GND: Bat1.2 C1.1 C2.2 C5.1 C6.1 C7.1 C8.1 C9.1 C10.1 C11.1 C12.1 D1.3 IC1.4 IC1.5 IC2.4 IC4.33 pad.4 R5.1 R13.2 R14.2 R15.2 R16.2 R18.2 | length 0.9
  Top Layer w0.254: D1.3 v1(22.536,15.015)
  Bottom Layer w0.254: v1(69.85,4.325) v1@69.875,4.325 ; v1(69.85,11.825) v1@69.875,11.825 ; v1(69.85,17.825) v1@69.875,17.825 ; v1(69.975,25.375) v1@70,25.375
  other v1: 20.547,1.529 23.547,1.529 26.547,1.529 29.547,1.529 32.547,1.529 35.547,1.529 38.547,1.529 41.547,1.529 44.547,1.529 47.547,1.529 50.547,1.529 53.547,1.529 56.547,1.529 59.547,1.529 16.047,4.529 19.047,4.529 31.047,4.529 34.047,4.529 37.047,4.529 40.047,4.529 43.047,4.529 46.047,4.529 49.047,4.529 52.047,4.529 55.047,4.529 58.047,4.529 61.047,4.529 64.047,4.529 14.547,7.529 17.547,7.529 44.547,7.529 47.547,7.529 50.547,7.529 53.547,7.529 56.547,7.529 59.547,7.529 43.047,10.529 46.047,10.529 49.047,10.529 52.047,10.529 55.047,10.529 58.047,10.529 19.1,11.3 21.225,11.45 31.861,12.225 33.515,12.225 17.5,12.525 41.547,13.529 44.547,13.529 47.547,13.529 50.547,13.529 53.547,13.529 59.547,13.529 21.675,13.8 23.92,14.235 17.525,14.985 64.9,15.125 34.475,15.538 40.047,16.529 43.047,16.529 49.047,16.529 52.047,16.529 55.047,16.529 58.047,16.529 14.2,17.25 16.225,17.25 21.575,18.19 32.061,18.265 26.625,18.65 22.325,19.25 61.075,19.5 41.547,19.529 44.547,19.529 47.547,19.529 53.547,19.529 56.547,19.529 14.2,20.1 27.75,20.23 35.95,20.425 22.325,21.375 24.956,21.375 40.047,22.529 43.047,22.529 46.047,22.529 49.047,22.529 52.047,22.529 58.047,22.529 63.55,22.9 22.708,24.375 55.325,25.4 38.547,25.529 41.547,25.529 47.547,25.529 50.547,25.529 59.547,25.529 19.175,25.675 17.875,26.198 64.175,28.55 15,28.947 36.75,33.85
  other v2: 28.261,14.465 29.361,14.465 30.461,14.465 28.261,15.565 29.361,15.565 30.461,15.565 28.261,16.665 29.361,16.665 30.461,16.665
N\R\S\T\: C7.2 IC4.4 R9.1 | length 4.9
  Top Layer w0.254: IC4.4 33.231,15.315 C7.2 35.766,14.95 R9.1
NetC2_1: C2.1 IC2.8 IC3.2 | length 4.1
  Top Layer w0.254: IC3.2@23.685,23.46 IC2.8 25.631,23.455 25.631,22.369 C2.1
NetC5_2: C5.2 IC4.2 Y1.2 | length 6.7
  Top Layer w0.254: IC4.2 32.331,14.315 34.306,12.34 34.306,10.915 C5.2 34.406,10.965 Y1.2
NetC6_2: C6.2 IC4.3 Y1.1 | length 10.6
  Top Layer w0.254: IC4.3 31.997,14.804 32.442,14.804 35.431,11.815 37.456,11.815 C6.2@38.356,10.915 ; Y1.1 36.706,9.515 38.106,10.915 C6.2@38.356,10.915 ; C6.2 C6.2@38.356,10.915
NetIC1_1: IC1.1 IC4.29 R3.2 | length 15.1
  Top Layer w0.254: R3.2 v1(28.531,11.09) ; IC1.1 28.811,5.165 29.611,5.965 IC4.29
  Bottom Layer w0.254: v1(28.531,11.09) 29.361,10.26 v1(29.361,5.74)
NetIC1_2: IC1.2 IC4.28 | length 7.8
  Top Layer w0.254: IC1.2 28.456,5.815 29.111,6.47 IC4.28
NetIC1_6: IC1.6 IC4.30 R4.2 | length 17.7
  Top Layer w0.254: IC1.6@26.032,5.166 26.508,4.69 v1(29.261,4.69) 30.111,5.54 IC4.30 ; R4.2 v1(28.531,9.515)
  Bottom Layer w0.254: v1(28.531,9.515) 28.531,5.42 v1(29.261,4.69)
NetIC2_1: IC2.1 IC4.10 R1.1 | length 8.7
  Top Layer w0.254: IC4.10 30.611,22.07 32.001,23.46 IC2.1 ; R1.1 v1(31.856,21.815)
  Bottom Layer w0.254: v1(31.856,21.815) 31.858,21.818 31.858,23.388 v1(31.861,23.39)
NetIC2_2: IC2.2 IC4.12 | length 8.5
  Top Layer w0.254: IC4.12 29.611,22.698 31.576,24.664 32.67,24.664 IC2.2
NetIC2_3: IC2.3 IC4.9 | length 11.1
  Top Layer w0.254: IC4.9 31.111,21.853 31.748,22.49 33.431,22.49 34.131,23.19 34.131,25.39 33.521,26 IC2.3
NetIC2_5: IC2.5 IC4.13 | length 11
  Top Layer w0.254: IC2.5 26.451,27.27 29.111,24.61 IC4.13
NetIC2_6: IC2.6 IC4.11 | length 13.5
  Top Layer w0.254: v1(24.281,26.015) 24.288,26.008 25.628,26.008 IC2.6 ; IC4.11 30.111,22.415 v1(30.411,22.715)
  Bottom Layer w0.254: v1(24.281,26.015) 27.111,26.015 v1(30.411,22.715)
NetIC2_7: IC2.7 IC4.14 | length 8.2
  Top Layer w0.254: IC2.7 25.662,24.704 26.317,24.704 28.611,22.41 IC4.14
NetIC3_1: IC3.1 IC4.15 R19.1 | length 10.4
  Top Layer w0.254: R19.1 21.725,23.45 24.55,20.625 26.15,20.625 28.111,18.664 IC4.15
NetIC4_16: IC4.16 R2.2 R13.1 | length 74.3
  Top Layer w0.254: R2.2 v1(20.175,20) 20.419,20.244 25.992,20.244 27.611,18.625 IC4.16 ; v1(20.175,27.325) 20.674,27.824 42.176,27.824 65.675,4.325 R13.1
  Bottom Layer w0.254: v1(20.175,20) v1(20.175,27.325)
NetIC4_18: IC4.18 R12.2 R16.1 | length 73.9
  Top Layer w0.254: R12.2 v1(18.6,19.975) 21.76,16.815 IC4.18 ; v1(18.6,27.325) 19.48,28.205 49.295,28.205 65.675,11.825 R16.1
  Bottom Layer w0.254: v1(18.6,19.975) v1(18.6,27.325)
NetIC4_19: IC4.19 R11.2 R15.1 | length 75.1
  Top Layer w0.254: R11.2 v1(17.025,19.975) 19.819,17.181 20.769,17.181 21.519,16.431 23.208,16.431 23.324,16.315 IC4.19 ; v1(17.025,27.325) 18.286,28.586 54.828,28.586 65.589,17.825 R15.1
  Bottom Layer w0.254: v1(17.025,19.975) v1(17.025,27.325)
NetIC4_20: IC4.20 R10.2 R14.1 | length 75.8
  Top Layer w0.254: R10.2 v1(15.45,19.975) 15.535,19.975 18.71,16.8 20.534,16.8 21.284,16.05 23.05,16.05 23.285,15.815 IC4.20 ; v1(15.45,27.325) 17.092,28.967 62.033,28.967 65.625,25.375 R14.1
  Bottom Layer w0.254: v1(15.45,19.975) v1(15.45,27.325)
NetIC4_31: IC4.31 R5.2 | length 2.3
  Top Layer w0.254: IC4.31 30.611,11.485 30.858,11.238 30.858,11.188 31.156,10.89 R5.2
SWCLK: IC4.24 pad.3@22.336,9.015 | length 7.3
  Top Layer w0.254: pad.3@22.336,9.015 22.336,10.515 25.636,13.815 IC4.24
SWDIO: IC4.23 pad.2@21.111,9.015 | length 8.7
  Top Layer w0.254: pad.2@21.111,9.015 21.111,10.515 24.911,14.315 IC4.23
SYS_WKUP: IC4.6 R17.2 R18.1 | length 18.6
  Top Layer w0.254: IC4.6 32.39,16.315 32.952,16.877 32.952,18.745 35.307,21.1 36.75,21.1 v1(36.75,21.675) ; v1(36.75,29.525) R18.1
  Bottom Layer w0.254: v1(36.75,21.675) v1(36.75,29.525)
USB_HS_DM_N: D1.2 IC4.21 R6.1 | length 10.5
  Top Layer w0.254: R6.1 v1(18.686,13.915) 19.561,13.915 D1.2 ; v1(20.886,15.665) 21.152,15.665 21.156,15.669 22.892,15.669 23.246,15.315 IC4.21
  Bottom Layer w0.254: v1(18.686,13.915) 19.136,13.915 v1(20.886,15.665)
USB_HS_DM_P: D1.1 IC4.22 R7.1 R8.2 | length 14
  Top Layer w0.254: R8.2 18.161,11.24 21.156,14.235 21.156,14.361 ; R7.1 19.586,16.09 D1.1 19.711,15.806 21.156,14.361 ; IC4.22 23.246,14.815 22.792,14.361 21.156,14.361
VDDA: C9.2 C12.2 FB1.1 IC4.5 | length 5.3
  Top Layer w0.254: IC4.5 32.631,15.815 33.656,16.84 C12.2 C9.2 FB1.1
Vsensor: C1.2 IC1.3 IC4.27 R3.1 R4.1 | length 9.1
  Top Layer w0.254: IC1.3 28.471,6.465 28.625,6.619 28.625,7.296 C1.2 26.706,9.215 R4.1 R3.1 26.706,11.565 27.231,12.09 28.12,12.09 28.588,12.558 28.588,12.917 IC4.27
Vusb: pad.1@7.385,11.19 R8.1 | length 9.5
  Top Layer w0.254: pad.1@7.385,11.19 R8.1
pads on no net: IC1.7 IC4.7 IC4.8 IC4.25 IC4.26 IC4.32 R6.2 R7.2
copper on no net: | length 18.3
  Top Layer w0.254: 7.703,13.92 16.856,13.92 16.861,13.915 ; 7.703,16.079 16.85,16.079 16.861,16.09

## Polygon pours and split planes (outlines as drawn)
GND on Top Layer "Top Layer-GND" (solid, remove dead copper, pour order 2): 35.225,30 35.225,35.5 38.225,35.5 38.225,30 63,30 cw(c63,27) 66,27 66,26.85 67,26.85 71.5,26.85 71.5,23.85 66,23.85 66,19.35 67,19.35 71.5,19.35 71.5,16.35 67,16.35 66,16.35 66,13.35 67,13.35 71.5,13.35 71.5,10.35 67,10.35 66,10.35 66,5.85 67,5.85 71.5,5.85 71.5,2.85 67,2.85 65.996,2.85 cw(c63.001,2.999) 63,0 16,0 cw(c16,2) 14,2 14,7.5 ccw(c12.5,7.501) 12.5,9 1,9 cw(c1,10) 0,10 0,20 cw(c1,20) 1,21 12.5,21 ccw(c12.5,22.5) 14,22.5 14,28 cw(c16,28) 16,30
GND on Bottom Layer "Bottom Layer-GND" (solid, remove dead copper, pour order 3): 35.225,30 35.225,35.5 38.225,35.5 38.225,30 63,30 cw(c63,27) 66,27 66,26.85 67,26.85 71.5,26.85 71.5,23.85 67,23.85 66,23.85 66,19.35 67,19.35 71.5,19.35 71.5,16.35 67,16.35 66,16.35 66,13.35 67,13.35 71.5,13.35 71.5,10.35 67,10.35 66,10.35 66,5.85 67,5.85 71.5,5.85 71.5,2.85 67,2.85 65.996,2.85 cw(c63,3) 63,0 16,0 cw(c16,2) 14,2 14,7.5 ccw(c12.5,7.5) 12.5,9 1,9 cw(c1,10) 0,10 0,20 cw(c1,20) 1,21 12.5,21 ccw(c12.5,22.5) 14,22.5 14,28 cw(c16,28) 16,30

## Silkscreen, mask and mechanical layers (free items; w line width, h text height)
Top Overlay:
  text "-" at 23.911,6.09 h1.52 r90
  text "+" at 20.261,5.94 h1.52 r90
  text "D" at 21.536,5.915 h1.52 r90
  text "C" at 22.761,5.915 h1.52 r90
Bottom Overlay:
  text "BREAK / START" at 35.75,31 h1.5 r270
  text "1 / MIN" at 71.525,24.05 h2
  text "2 / MIN" at 71.5,16.625 h2
  text "STL0-UTMP" at 44.675,11.65 h2
  text "5 / MIN" at 71.5,10.575 h2
  text "10 / MIN" at 71.5,3.275 h1.7
Mechanical 1:
  lines w0.3: 0,10 ccw(c1,10) 1,9 12.5,9 cw(c12.5,7.5) 14,7.5 14,2 ccw(c16,2) 16,0 63.15,0 ccw(c63.15,2.85) 66,2.85 67,2.85 71.5,2.85 71.5,5.85 67,5.85 66,5.85 66,10.35 67,10.35 71.5,10.35 71.5,13.35 67,13.35 66,13.35 66,16.35 67,16.35 71.5,16.35 71.5,19.35 67,19.35 66,19.35 66,23.85 71.5,23.85 71.5,26.85 66,26.85 66,27 ccw(c63,27) 63,30 38.225,30 38.225,35.5 35.225,35.5 35.225,30 16,30 ccw(c16,28) 14,28 14,22.5 cw(c12.5,22.5) 12.5,21 1,21 ccw(c1,20) 0,20 0,10

## Dimensions
14,28 to 66,27 on Mechanical 10
63,30 to 63.15,0 on Mechanical 10
0,20 to 14,22.5 on Mechanical 10